# Altium PCB 微步進驅動器TB6560.PCBDOC
Units mm, origin at the board's own origin, x right, y up, seen from the top; angles counter-clockwise.
Board outline 152.4 x 101.6 mm, 2 copper layers (Top Layer, Bottom Layer); 26 components, 27 nets, 101 pads, 16 vias.
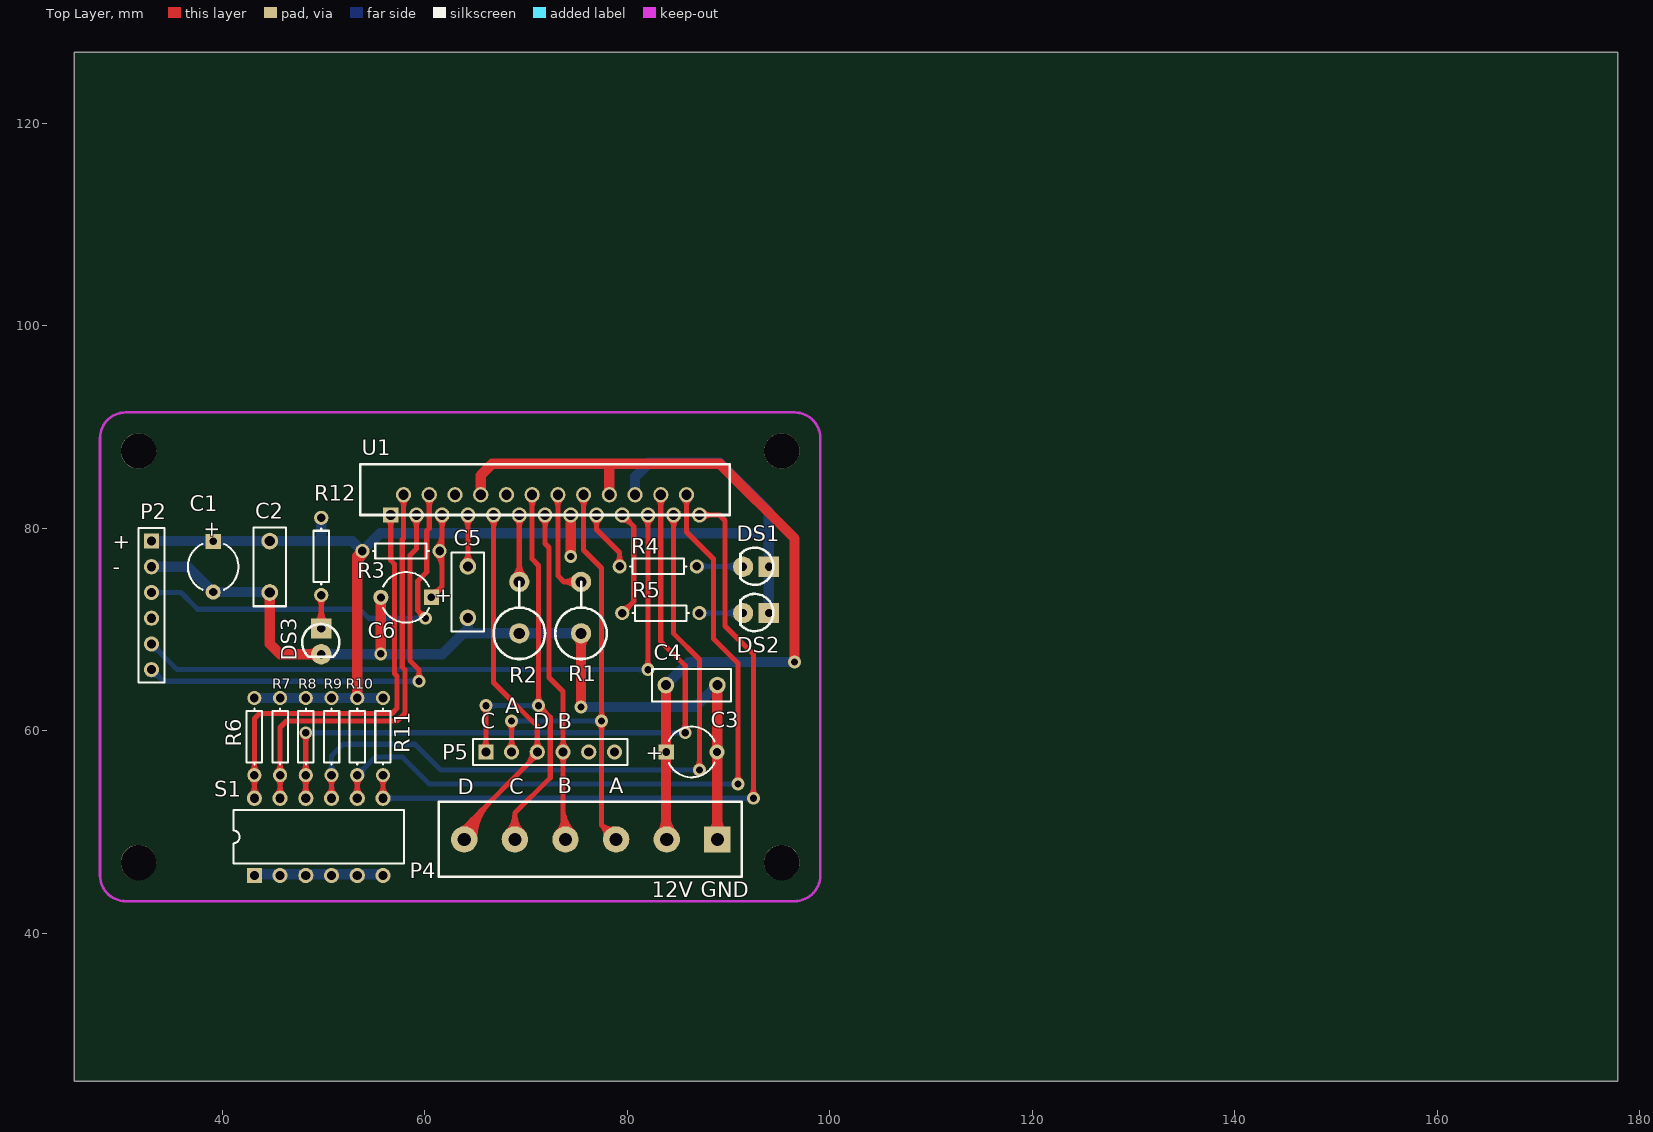
[diagram p0: Top Layer view]
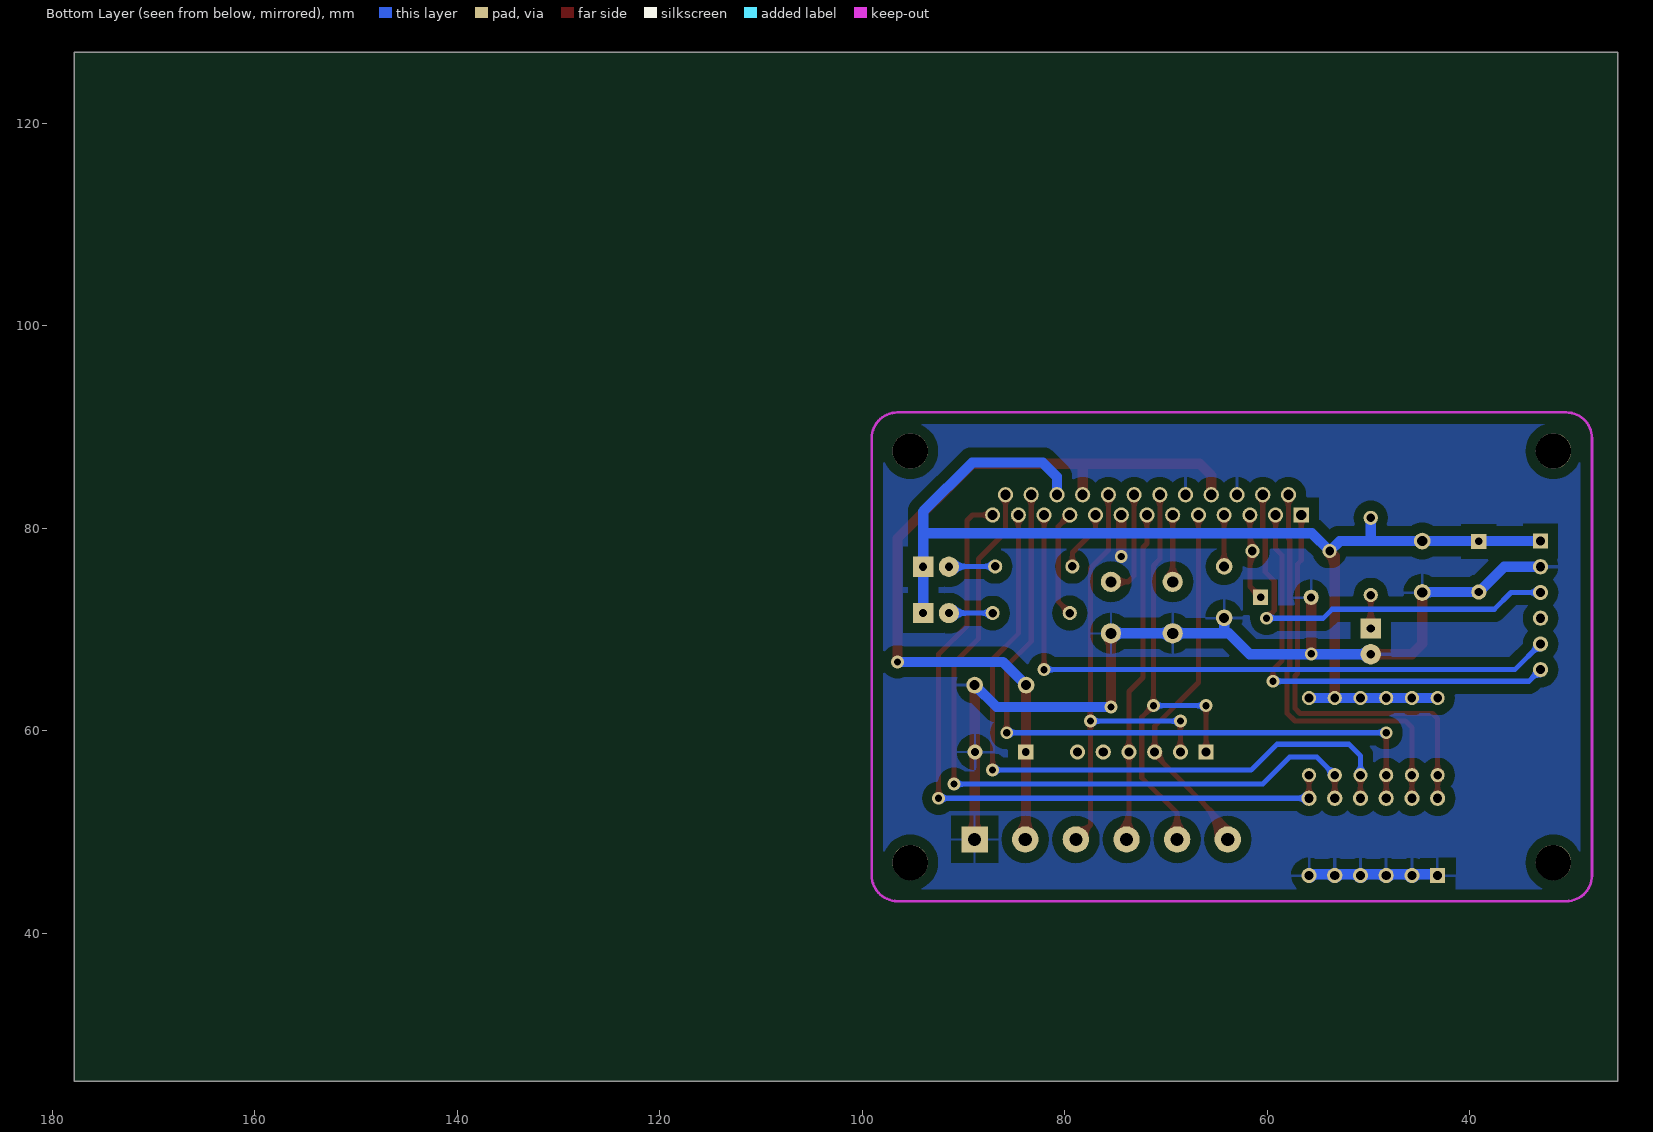
[diagram p1: Bottom Layer view, seen from below]

## Layer stack, top to bottom
Top Layer: signal copper 0.0356
Dielectric: dielectric 0.32, FR-4, Dk 4.8
Bottom Layer: signal copper 0.0356

## Board outline
25.4,25.4 177.8,25.4 177.8,127 25.4,127

## Design rules (kind name [scope] priority, off if disabled: settings)
Clearance [All] p1: gap=0.254
ComponentClearance [All] p1: gap=0.254 collisioncheckmode=0
HoleSize [All] p1: absolutevalues=TRUE maxlimit=3.81 minlimit=0.025 maxpercent=80.000 minpercent=20.000
PolygonConnect [All] p1: connectstyle=Relief reliefconductorwidth=0.254 reliefentries=4 polygonreliefangle="90 Angle"
RoutingVias [All] p1: holewidth=0.711 width=1.27 viastyle="Through Hole" minholewidth=0.711 minwidth=1.27 maxholewidth=0.711 maxwidth=1.27
SolderMaskExpansion [All] p1: expansion=0.102
TestPointUsage [All] p1: valid=0 allowmultiple=FALSE
Testpoint [All] p1: side=15 testpointundercomponent=TRUE minsize=1.016 maxsize=2.54 preferedsize=1.524 minholesize=0 maxholesize=1.016 preferedholesize=0.813 testpointgrid=0.025 style=1023 order=-539222988
Width power [InNetClass('power')] p1: maxlimit=1.016 minlimit=0.254 preferedwidth=1.016
Width [All] p2: maxlimit=1.016 minlimit=0.254 preferedwidth=0.508
16 further rules are at their usual default settings.

## Classes and differential pairs
net class power: +12 GND VCC

## Components (designator, comment, footprint, x,y, rotation, side; value= is the part's Value field where it differs from the comment)
C1 "Cap Pol1" CAPPR5-5x5 39.116,76.2 r270 top
C2 "Cap" CAPR5.08-7.8x3.2 44.704,76.2 r90 top
C3 "Cap Pol1" CAPPR5-5x5 86.36,57.912 r0 top
C4 "Cap" CAPR5.08-7.8x3.2 86.36,64.516 r180 top
C5 "Cap" CAPR5.08-7.8x3.2 64.262,73.692 r90 top
C6 "Cap Pol1" CAPPR5-5x5 58.166,73.184 r180 top
DS1 "LED1" "LED 3mm T" 93.98,76.2 r180 top
DS2 "LED1" "LED 3mm T" 93.98,71.628 r180 top
DS3 "LED1" "LED 3mm T" 49.784,70.104 r270 top
P2 "Header 6" HDR1X6 33.02,78.74 r270 top
P4 "Header 6" 6pinºÝ¤l-1 88.9,49.276 r180 top
P5 "Header 6" HDR1X6 66.04,57.912 r0 top
R1 "Res1" ¹qªý5.08mm 75.438,74.708 r270 top
R2 "Res1" ¹qªý5.08mm 69.342,74.708 r270 top
R3 "Res1" AXIAL-0.3 57.658,77.756 r180 top
R4 "Res1" AXIAL-0.3 83.058,76.232 r0 top
R5 "Res1" AXIAL-0.3 83.312,71.628 r0 top
R6 "Res1" AXIAL-0.3 43.18,59.436 r90 top
R7 "Res1" AXIAL-0.3 45.72,59.436 r90 top
R8 "Res1" AXIAL-0.3 48.26,59.436 r90 top
R9 "Res1" AXIAL-0.3 50.8,59.436 r90 top
R10 "Res1" AXIAL-0.3 53.34,59.436 r90 top
R11 "Res1" AXIAL-0.3 55.88,59.436 r90 top
R12 "Res1" AXIAL-0.3 49.784,77.216 r90 top
S1 "SW DIP-6" DIP-12/SW 49.53,49.53 r0 top
U1 "TB6560" TB6560AHQ 56.642,81.312 r0 top

## Footprints (in the part's own frame and the unit in brackets; to place one, negate y for a bottom-side part, rotate by r counter-clockwise, add the part's x,y. Pads: shape width x height; smd on the part's side, far side on the other; paste and mask are expansions set on the pad)
6pinºÝ¤l-1 [mm]
  rect 2.6x2.6 hole 1.3: 1(0,0)
  round 2.6 hole 1.3: 2(5,0) 3(10,0) 4(15,0) 5(20,0) 6(25,0)
  silkscreen extent -2.4,-3.7 27.5,3.7
AXIAL-0.3 [mm] "Resistor; 2 Leads"
  round 1.4 hole 0.85: 1(-3.81,0) 2(3.81,0)
  silkscreen extent -2.77,-0.76 2.77,0.76
CAPPR5-5x5 [mm] "Capacitor, Electrolytic, Radial; Body 5 x 5 mm (Dia.xH typ); Pin Spacing 5 mm (typ)"
  rect 1.5x1.5 hole 0.75: 1(-2.5,0)
  round 1.5 hole 0.8: 2(2.5,0)
  silkscreen extent -2.26,-2.5 2.27,2.5
CAPR5.08-7.8x3.2 [mm] "Capacitor, Ceramic, Thru-Hole, Dipped Radial; Body 7.8 x 3.2 mm (WxT) Pin Spacing 5.08 mm (typ)"
  round 1.65 hole 1: 1(-2.54,0) 2(2.54,0)
  silkscreen extent -3.9,-1.6 3.9,1.6
DIP-12/SW [mm] "DIP Switch; 12 Leads"
  rect 1.5x1.5 hole 0.9: 1(-6.35,-3.81)
  round 1.5 hole 0.9: 2(-3.81,-3.81) 3(-1.27,-3.81) 4(1.27,-3.81) 5(3.81,-3.81) 6(6.35,-3.81) 7(6.35,3.81) 8(3.81,3.81) 9(1.27,3.81) 10(-1.27,3.81) 11(-3.81,3.81) 12(-6.35,3.81)
  silkscreen extent -8.43,-2.65 8.41,2.65
HDR1X6 [mm] "Connector; Header; 6 Position"
  rect 1.5x1.5 hole 0.9: 1(0,0)
  round 1.5 hole 0.9: 2(2.54,0) 3(5.08,0) 4(7.62,0) 5(10.16,0) 6(12.7,0)
  silkscreen extent -1.27,-1.27 13.97,1.27
"LED 3mm T" [mm]
  rect 2x2 hole 0.8: 1(0,0)
  round 2 hole 0.8: 2(2.54,0)
  silkscreen extent -0.45,-1.89 2.8,1.79
TB6560AHQ [mm]
  rect 1.5x1.5 hole 1: 1(0,0)
  round 1.5 hole 1: 2(1.27,2) 3(2.54,0) 4(3.81,2) 5(5.08,0) 6(6.35,2) 7(7.62,0) 8(8.89,2) 9(10.16,0) 10(11.43,2) 11(12.7,0) 12(13.97,2) 13(15.24,0) 14(16.51,2) 15(17.78,0) 16(19.05,2) 17(20.32,0) 18(21.59,2) 19(22.86,0) 20(24.13,2) 21(25.4,0) 22(26.67,2) 23(27.94,0) 24(29.21,2) 25(30.48,0)
  silkscreen extent -3,0 33.48,5
¹qªý5.08mm [mm]
  round 2 hole 1.1: 1(0,0) 2(5.08,0)
  silkscreen extent 0,-2.54 7.62,2.54

## Part data
C1 C3 C6: "Polarized Capacitor (Radial)"
C2 C4 C5: "Capacitor"
DS1 DS2 DS3: "Typical RED GaAs LED"
P2: library part "Header 3", "Header, 3-Pin"
P4 P5: "Header, 6-Pin"
R1 R2 R3 R4 R5 R6 R7 R8 R9 R10 R11 R12: "Resistor"
S1: "DIP Switch"

## Free pads (board coordinates)
  round 3.5 hole 3.5: 0(31.75,87.63) 1(31.75,46.99) 2(95.25,46.99) 3(95.25,87.63)

## Via types
v1: diameter 1.27, hole 0.711, Top Layer to Bottom Layer, 16 vias

## Nets (pads, with @x,y where several pads share a name; then routed paths per layer and width w, separated by ;. In a path a pad name is that pad's centre, name@x,y a point inside that pad or via, vN(x,y) a via of type N, cw(c..) or ccw(c..) an arc to the next point about the centre after c; other vN are vias at no path point)
+12: C3.1 C4.2 P4.2 U1.8 U1.18 | length 83.6
  Top Layer w1.016: U1.8 65.532,85.217 66.675,86.36 89.154,86.36 96.52,78.994 v1(96.52,66.802) ; U1.18 78.232,86.36 ; P4.2@83.34,49.836 ccw(c82.181,50.995) 83.82,50.995 ; 83.82,51.381 ccw(c86.005,51.381) P4.2@84.46,49.836 ; C4.2 83.82,49.356 P4.2
  Bottom Layer w1.016: C4.2 86.106,66.802 v1(96.52,66.802)
A: P4.3 P5.2 U1.16 | length 61
  Top Layer w0.508: P5.2@68.229,58.263 ccw(c67.383,59.109) 68.58,59.109 ccw(c69.777,59.109) P5.2@68.931,58.263 ; v1@68.311,60.691 cw(c67.66,60.04) 68.58,60.04 cw(c69.5,60.04) v1@68.849,60.691 ; P5.2 v1(68.58,60.96) ; U1.16@75.341,82.961 cw(c74.495,82.115) 75.692,82.115 cw(c76.889,82.115) U1.16@76.043,82.961 ; U1.16 75.692,77.851 77.47,76.073 77.47,50.706 ; v1@77.201,60.691 cw(c76.55,60.04) 77.47,60.04 cw(c78.39,60.04) v1@77.739,60.691 ; v1@77.201,61.229 ccw(c76.55,61.88) 77.47,61.88 ccw(c78.39,61.88) v1@77.739,61.229 ; P4.3@77.869,49.452 ccw(c76.458,49.693) 77.47,50.706 ; P4.3@78.724,50.307 cw(c78.483,51.718) 77.47,50.706 ; P4.3 77.47,50.706
  Bottom Layer w0.508: v1(68.58,60.96) v1(77.47,60.96) ; v1@68.849,60.691 cw(c69.5,60.04) 69.5,60.96 cw(c69.5,61.88) v1@68.849,61.229 ; v1@77.201,60.691 ccw(c76.55,60.04) 76.55,60.96 ccw(c76.55,61.88) v1@77.201,61.229
B: P4.4 P5.4 U1.13 | length 44.1
  Top Layer w0.508: U1.13@71.531,80.961 cw(c70.685,80.115) 71.882,80.115 cw(c73.079,80.115) U1.13@72.233,80.961 ; U1.13 71.882,78.486 72.263,78.105 72.263,65.278 73.66,63.881 73.66,49.516 P4.4 ; P4.4@73.16,50.016 ccw(c71.954,51.222) 73.66,51.222 ; P5.4@73.309,57.561 cw(c72.463,56.715) 73.66,56.715 cw(c74.857,56.715) P5.4@74.011,57.561 ; P5.4@73.309,58.263 ccw(c72.463,59.109) 73.66,59.109 ccw(c74.857,59.109) P5.4@74.011,58.263 ; 73.66,51.154 ccw(c75.778,51.154) P4.4@74.28,49.656 ; 73.66,52.381 ccw(c77.005,52.381) P4.4@74.64,50.016
C: P4.5 P5.1 U1.12 | length 60.9
  Top Layer w0.508: P5.1@65.689,58.263 ccw(c64.843,59.109) 66.04,59.109 ccw(c67.237,59.109) P5.1@66.391,58.263 ; v1@65.771,62.215 cw(c65.12,61.564) 66.04,61.564 cw(c66.96,61.564) v1@66.309,62.215 ; P5.1 v1(66.04,62.484) ; P4.5@68.16,50.016 ccw(c66.375,51.801) 68.9,51.801 ccw(c71.425,51.801) P4.5@69.64,50.016 ; P4.5 68.9,51.882 72.39,55.372 72.39,61.341 v1(71.247,62.484) 71.247,76.327 70.612,76.962 U1.12 ; U1.12@70.261,82.961 cw(c69.415,82.115) 70.612,82.115 cw(c71.809,82.115) U1.12@70.963,82.961 ; v1@70.978,62.753 ccw(c70.327,63.404) 71.247,63.404 ccw(c72.167,63.404) v1@71.516,62.753 ; v1@71.247,62.103 cw(c71.247,61.183) 71.897,61.834 cw(c72.548,62.484) v1@71.628,62.484
  Bottom Layer w0.508: v1(66.04,62.484) v1(71.247,62.484) ; v1@66.309,62.215 cw(c66.96,61.564) 66.96,62.484 cw(c66.96,63.404) v1@66.309,62.753 ; v1@70.978,62.215 ccw(c70.327,61.564) 70.327,62.484 ccw(c70.327,63.404) v1@70.978,62.753
COM1: P5.5
COM2: P5.6
D: P4.6 P5.3 U1.9 | length 52.1
  Top Layer w0.508: P4.6 63.9,50.438 71.12,57.658 71.12,60.452 66.802,64.77 U1.9 ; P4.6@63.93,49.276 cw(c66.808,49.276) 64.773,51.311 ; P4.6@64.438,49.276 cw(c68.542,49.276) 65.64,52.178 ; P4.6@64.946,49.276 cw(c70.277,49.276) 66.507,53.045 ; U1.9@66.451,80.961 cw(c65.605,80.115) 66.802,80.115 cw(c67.999,80.115) U1.9@67.153,80.961 ; 70.094,56.632 ccw(c68.813,57.912) P5.3@70.624,57.912 ; 70.707,57.245 cw(c71.12,56.832) P5.3@71.12,57.416 ; P5.3@70.769,58.263 ccw(c69.923,59.109) 71.12,59.109 ccw(c72.317,59.109) P5.3@71.471,58.263
GND: C1.2 C2.1 C3.2 C4.1 C5.1 C6.2 DS3.2 P2.2 P4.1 R1.2 R2.2 S1.1 S1.2 S1.3 S1.4 S1.5 S1.6 U1.6 U1.10 U1.15 | length 134
  Top Layer w1.016: C2.1 44.704,68.58 45.72,67.564 DS3.2 ; DS3.2@49.436,67.216 ccw(c48.596,66.376) 48.596,67.564 ccw(c48.596,68.752) DS3.2@49.436,67.912 ; v1(55.666,67.604) C6.2 ; v1(74.422,77.216) U1.15 ; R1.2@75.09,69.28 cw(c74.25,68.44) 75.438,68.44 cw(c76.626,68.44) R1.2@75.786,69.28 ; v1(75.438,62.357) R1.2 ; P4.1@88.34,49.836 ccw(c86.988,51.188) 88.9,51.188 ccw(c90.812,51.188) P4.1@89.46,49.836 ; P4.1 C4.1@88.9,64.77
  Bottom Layer w1.016: P2.2 36.616,76.2 C1.2 44.664,73.7 C2.1 ; S1.1@43.053,45.847 S1.6@56.007,45.847 ; S1.1@43.351,45.549 cw(c44.071,44.829) 44.071,45.847 ; 43.842,73.7 cw(c43.842,72.798) C2.1@44.48,73.436 ; 44.829,45.847 cw(c44.829,44.829) S1.2@45.549,45.549 ; S1.2@45.891,45.549 cw(c46.611,44.829) 46.611,45.847 ; 47.369,45.847 cw(c47.369,44.829) S1.3@48.089,45.549 ; S1.3@48.431,45.549 cw(c49.151,44.829) 49.151,45.847 ; DS3.2 61.722,67.564 63.786,69.628 R1.2 ; 49.909,45.847 cw(c49.909,44.829) S1.4@50.629,45.549 ; DS3.2@50.132,67.216 cw(c50.972,66.376) 50.972,67.564 cw(c50.972,68.752) DS3.2@50.132,67.912 ; S1.4@50.971,45.549 cw(c51.691,44.829) 51.691,45.847 ; 52.449,45.847 cw(c52.449,44.829) S1.5@53.169,45.549 ; S1.5@53.511,45.549 cw(c54.231,44.829) 54.231,45.847 ; 54.989,45.847 cw(c54.989,44.829) S1.6@55.709,45.549 ; 64.262,69.628 C5.1 ; R2.2@68.994,69.28 ccw(c68.154,68.44) 68.154,69.628 ccw(c68.154,70.816) R2.2@68.994,69.976 ; R2.2@69.69,69.28 cw(c70.53,68.44) 70.53,69.628 cw(c70.53,70.816) R2.2@69.69,69.976 ; R1.2@75.09,69.28 ccw(c74.25,68.44) 74.25,69.628 ccw(c74.25,70.816) R1.2@75.09,69.976 ; v1(75.438,62.357) 86.741,62.357 C4.1
NetC5_2: C5.2 U1.7 | length 9.1
  Top Layer w0.508: C5.2@63.858,76.636 ccw(c62.883,77.611) 64.262,77.611 ccw(c65.641,77.611) C5.2@64.666,76.636 ; U1.7@63.911,80.961 cw(c63.065,80.115) 64.262,80.115 cw(c65.459,80.115) U1.7@64.613,80.961 ; C5.2 U1.7
NetC6_1: C6.1 R3.1 U1.5 | length 15.4
  Top Layer w0.508: C6.1 61.722,74.24 U1.5 ; C6.1@60.666,73.68 ccw(c60.666,74.877) 61.513,74.031 ccw(c62.359,73.184) C6.1@61.162,73.184 ; R3.1@61.153,77.441 cw(c59.778,76.066) 61.722,76.066 ; R3.1@61.153,78.071 ccw(c59.778,79.446) 61.722,79.446 ; U1.5@61.371,80.961 cw(c60.525,80.115) 61.722,80.115 cw(c62.919,80.115) U1.5@62.073,80.961
NetDS1_2: DS1.2 R4.2 | length 9.1
  Bottom Layer w0.508: R4.2 DS1.2@91.408,76.232 ; R4.2@87.183,75.917 cw(c87.945,75.155) 87.945,76.232 cw(c87.945,77.309) R4.2@87.183,76.547 ; 89.562,76.232 cw(c89.562,74.322) DS1.2@90.912,75.672 ; 89.716,76.232 ccw(c89.716,77.924) DS1.2@90.912,76.728
NetDS2_2: DS2.2 R5.2 | length 8.8
  Bottom Layer w0.508: R5.2 DS2.2 ; R5.2@87.437,71.313 cw(c88.199,70.551) 88.199,71.628 cw(c88.199,72.705) R5.2@87.437,71.943 ; DS2.2@90.912,71.1 ccw(c89.639,69.827) 89.639,71.628 ccw(c89.639,73.429) DS2.2@90.912,72.156
NetDS3_1: DS3.1 R12.1 | length 7.8
  Top Layer w0.508: DS3.1@49.256,70.632 ccw(c47.983,71.905) 49.784,71.905 ccw(c51.585,71.905) DS3.1@50.312,70.632 ; R12.1@49.469,73.091 cw(c48.707,72.329) 49.784,72.329 cw(c50.861,72.329) R12.1@50.099,73.091 ; DS3.1 R12.1
NetP2_3: P2.3 U1.4 | length 47.7
  Top Layer w0.508: v1@59.69,71.12 ccw(c58.77,71.12) 59.421,71.77 ccw(c60.071,72.421) v1@60.071,71.501 ; v1(60.071,71.12) 59.309,71.882 59.309,74.803 60.198,75.692 60.198,79.756 60.452,80.01 U1.4 ; U1.4@60.101,82.961 cw(c59.255,82.115) 60.452,82.115 cw(c61.649,82.115) U1.4@60.803,82.961
  Bottom Layer w0.508: P2.3 35.941,73.66 37.592,72.009 53.594,72.009 54.483,71.12 v1(60.071,71.12) ; P2.3@33.371,73.309 cw(c34.217,72.463) 34.217,73.66 cw(c34.217,74.857) P2.3@33.371,74.011 ; v1@59.802,70.851 ccw(c59.151,70.2) 59.151,71.12 ccw(c59.151,72.04) v1@59.802,71.389
NetP2_5: P2.5 U1.21 | length 72
  Top Layer w0.508: U1.21@81.691,80.961 cw(c80.845,80.115) 82.042,80.115 cw(c83.239,80.115) U1.21@82.393,80.961 ; v1@81.773,66.309 ccw(c81.122,66.96) 82.042,66.96 ccw(c82.962,66.96) v1@82.311,66.309 ; v1(82.042,66.04) U1.21
  Bottom Layer w0.508: P2.5@33.02,68.084 cw(c33.02,66.887) 33.867,67.733 cw(c34.713,68.58) P2.5@33.516,68.58 ; P2.5 35.56,66.04 v1(82.042,66.04) ; v1@81.773,65.771 ccw(c81.122,65.12) 81.122,66.04 ccw(c81.122,66.96) v1@81.773,66.309
NetP2_6: P2.6 U1.3 | length 50.6
  Top Layer w0.508: U1.3@58.831,80.961 cw(c57.985,80.115) 59.182,80.115 cw(c60.379,80.115) U1.3@59.533,80.961 ; v1@59.167,65.166 ccw(c58.516,65.817) 59.436,65.817 ccw(c60.356,65.817) v1@59.705,65.166 ; U1.3 59.182,77.978 58.547,77.343 58.547,66.929 59.436,66.04 v1(59.436,64.897)
  Bottom Layer w0.508: P2.6@33.02,65.544 cw(c33.02,64.347) 33.867,65.193 cw(c34.713,66.04) P2.6@33.516,66.04 ; P2.6 34.163,64.897 v1(59.436,64.897) ; v1@59.167,64.628 ccw(c58.516,63.977) 58.516,64.897 ccw(c58.516,65.817) v1@59.167,65.166
NetR1_1: R1.1 U1.14 | length 15
  Top Layer w0.508: U1.14@72.801,82.961 cw(c71.955,82.115) 73.152,82.115 cw(c74.349,82.115) U1.14@73.503,82.961 ; U1.14 73.152,75.311 73.755,74.708 ; R1.1@74.885,74.207 ccw(c73.755,73.183) 73.755,74.708 ; R1.1@74.885,75.209 cw(c73.755,76.233) 73.755,74.708 ; R1.1 73.755,74.708
NetR2_1: R2.1 U1.11 | length 11.3
  Top Layer w0.508: R2.1@68.814,75.236 ccw(c67.541,76.509) 69.342,76.509 ccw(c71.143,76.509) R2.1@69.87,75.236 ; U1.11@68.991,80.961 cw(c68.145,80.115) 69.342,80.115 cw(c70.539,80.115) U1.11@69.693,80.961 ; R2.1 U1.11
NetR4_1: R4.1 U1.17 | length 9.6
  Top Layer w0.508: U1.17@76.611,80.961 cw(c75.765,80.115) 76.962,80.115 cw(c78.159,80.115) U1.17@77.313,80.961 ; U1.17 76.962,79.883 79.248,77.597 R4.1 ; R4.1@78.933,76.547 ccw(c78.171,77.309) 79.248,77.309 ccw(c80.325,77.309) R4.1@79.563,76.547
NetR5_1: R5.1 U1.19 | length 14.2
  Top Layer w0.508: R5.1 80.645,72.771 80.645,80.169 U1.19 ; R5.1@79.502,72.074 ccw(c79.502,73.151) 80.263,72.389 ccw(c81.025,71.628) R5.1@79.948,71.628 ; U1.19@79.502,80.816 cw(c79.502,79.619) 80.349,80.465 cw(c81.195,81.312) U1.19@79.998,81.312
NetR6_1: R6.1 S1.12 U1.1 | length 48.9
  Top Layer w0.508: S1.12@42.829,53.691 ccw(c41.983,54.537) 43.18,54.537 ccw(c44.377,54.537) S1.12@43.531,53.691 ; R6.1@42.865,55.311 cw(c42.103,54.549) 43.18,54.549 cw(c44.257,54.549) R6.1@43.495,55.311 ; R6.1@42.865,55.941 ccw(c42.103,56.703) 43.18,56.703 ccw(c44.257,56.703) R6.1@43.495,55.941 ; S1.12 43.18,61.214 43.688,61.722 56.769,61.722 57.277,62.23 57.277,65.405 57.023,65.659 57.023,76.454 56.642,76.835 U1.1 ; U1.1@56.291,80.961 cw(c55.445,80.115) 56.642,80.115 cw(c57.839,80.115) U1.1@56.993,80.961
NetR7_1: R7.1 S1.11 U1.2 | length 48.8
  Top Layer w0.508: S1.11@45.369,53.691 ccw(c44.523,54.537) 45.72,54.537 ccw(c46.917,54.537) S1.11@46.071,53.691 ; R7.1@45.405,55.311 cw(c44.643,54.549) 45.72,54.549 cw(c46.797,54.549) R7.1@46.035,55.311 ; R7.1@45.405,55.941 ccw(c44.643,56.703) 45.72,56.703 ccw(c46.797,56.703) R7.1@46.035,55.941 ; S1.11 45.72,60.325 46.355,60.96 57.277,60.96 58.039,61.722 58.039,66.04 57.785,66.294 57.785,78.867 57.912,78.994 U1.2 ; U1.2@57.561,82.961 cw(c56.715,82.115) 57.912,82.115 cw(c59.109,82.115) U1.2@58.263,82.961
NetR8_1: R8.1 S1.10 U1.22 | length 81.4
  Top Layer w0.508: S1.10@47.909,53.691 ccw(c47.063,54.537) 48.26,54.537 ccw(c49.457,54.537) S1.10@48.611,53.691 ; R8.1@47.945,55.311 cw(c47.183,54.549) 48.26,54.549 cw(c49.337,54.549) R8.1@48.575,55.311 ; R8.1@47.945,55.941 ccw(c47.183,56.703) 48.26,56.703 ccw(c49.337,56.703) R8.1@48.575,55.941 ; v1@47.991,59.548 cw(c47.34,58.897) 48.26,58.897 cw(c49.18,58.897) v1@48.529,59.548 ; S1.10 v1(48.26,59.817) ; U1.22@82.961,82.961 cw(c82.115,82.115) 83.312,82.115 cw(c84.509,82.115) U1.22@83.663,82.961 ; U1.22 83.312,68.834 85.725,66.421 v1(85.725,59.817) ; v1@85.456,60.086 ccw(c84.805,60.737) 85.725,60.737 ccw(c86.645,60.737) v1@85.994,60.086
  Bottom Layer w0.508: v1(48.26,59.817) v1(85.725,59.817) ; v1@48.529,59.548 cw(c49.18,58.897) 49.18,59.817 cw(c49.18,60.737) v1@48.529,60.086 ; v1@85.456,59.548 ccw(c84.805,58.897) 84.805,59.817 ccw(c84.805,60.737) v1@85.456,60.086
NetR9_1: R9.1 S1.9 U1.23 | length 78.3
  Top Layer w0.508: S1.9@50.449,53.691 ccw(c49.603,54.537) 50.8,54.537 ccw(c51.997,54.537) S1.9@51.151,53.691 ; R9.1@50.485,55.311 cw(c49.723,54.549) 50.8,54.549 cw(c51.877,54.549) R9.1@51.115,55.311 ; S1.9 R9.1 ; U1.23@84.231,80.961 cw(c83.385,80.115) 84.582,80.115 cw(c85.779,80.115) U1.23@84.933,80.961 ; U1.23 84.582,69.596 87.122,67.056 v1(87.122,56.134) ; v1@86.853,56.403 ccw(c86.202,57.054) 87.122,57.054 ccw(c88.042,57.054) v1@87.391,56.403
  Bottom Layer w0.508: R9.1@50.485,55.941 ccw(c49.723,56.703) 50.8,56.703 ccw(c51.877,56.703) R9.1@51.115,55.941 ; R9.1 50.8,57.531 51.943,58.674 59.055,58.674 61.595,56.134 v1(87.122,56.134) ; v1@86.853,55.865 ccw(c86.202,55.214) 86.202,56.134 ccw(c86.202,57.054) v1@86.853,56.403
NetR10_1: R10.1 S1.8 U1.24 | length 82.4
  Top Layer w0.508: S1.8@52.989,53.691 ccw(c52.143,54.537) 53.34,54.537 ccw(c54.537,54.537) S1.8@53.691,53.691 ; R10.1@53.025,55.311 cw(c52.263,54.549) 53.34,54.549 cw(c54.417,54.549) R10.1@53.655,55.311 ; S1.8 R10.1 ; U1.24@85.501,82.961 cw(c84.655,82.115) 85.852,82.115 cw(c87.049,82.115) U1.24@86.203,82.961 ; U1.24 85.852,79.629 88.519,76.962 88.519,69.088 90.932,66.675 v1(90.932,54.737) ; v1@90.663,55.006 ccw(c90.012,55.657) 90.932,55.657 ccw(c91.852,55.657) v1@91.201,55.006
  Bottom Layer w0.508: R10.1 55.118,57.404 57.785,57.404 60.452,54.737 v1(90.932,54.737) ; R10.1@53.34,56.072 ccw(c53.34,57.149) 54.101,56.387 ccw(c54.863,55.626) R10.1@53.786,55.626 ; v1@90.663,54.468 ccw(c90.012,53.817) 90.012,54.737 ccw(c90.012,55.657) v1@90.663,55.006
NetR11_1: R11.1 S1.7 U1.25 | length 80.4
  Top Layer w0.508: S1.7@55.529,53.691 ccw(c54.683,54.537) 55.88,54.537 ccw(c57.077,54.537) S1.7@56.231,53.691 ; R11.1@55.565,55.311 cw(c54.803,54.549) 55.88,54.549 cw(c56.957,54.549) R11.1@56.195,55.311 ; S1.7 R11.1 ; U1.25 89.122,81.312 89.662,80.772 89.662,70.358 92.456,67.564 v1(92.456,53.34) ; U1.25@87.473,80.961 cw(c88.319,80.115) 88.319,81.312 cw(c88.319,82.509) U1.25@87.473,81.663 ; v1@92.187,53.609 ccw(c91.536,54.26) 92.456,54.26 ccw(c93.376,54.26) v1@92.725,53.609
  Bottom Layer w0.508: S1.7 v1(92.456,53.34) ; S1.7@56.231,52.989 cw(c57.077,52.143) 57.077,53.34 cw(c57.077,54.537) S1.7@56.231,53.691 ; v1@92.187,53.071 ccw(c91.536,52.42) 91.536,53.34 ccw(c91.536,54.26) v1@92.187,53.609
VCC: C1.1 C2.2 DS1.1 DS2.1 P2.1 R3.2 R6.2 R7.2 R8.2 R9.2 R10.2 R11.2 R12.2 U1.20 | length 127.5
  Top Layer w1.016: R10.2 53.34,77.248 R3.2 ; 53.34,76.066 cw(c55.538,76.066) R3.2@53.984,77.62 ; 53.34,77.038 cw(c53.867,77.038) R3.2@53.853,77.564
  Bottom Layer w1.016: P2.1 52.864,78.74 R3.2 55.594,79.502 93.98,79.502 ; R6.2 R11.2 ; 49.784,78.74 R12.2 ; U1.20 80.772,85.09 82.169,86.487 89.154,86.487 93.98,81.661 DS2.1 ; DS2.1@93.632,71.976 ccw(c92.792,72.816) 93.98,72.816 ccw(c95.168,72.816) DS2.1@94.328,71.976 ; DS1.1@93.632,75.852 cw(c92.792,75.012) 93.98,75.012 cw(c95.168,75.012) DS1.1@94.328,75.852 ; DS1.1@93.632,76.548 ccw(c92.792,77.388) 93.98,77.388 ccw(c95.168,77.388) DS1.1@94.328,76.548
pads on no net: P2.4

## Polygon pours and split planes (outlines as drawn)
GND on Bottom Layer (solid, remove dead copper): 28.321,91.059 28.321,43.815 98.425,43.815 98.425,90.932 28.321,90.932

## Keep-outs
Keep-Out Layer:
  lines w0.254: 27.94,45.72 ccw(c30.48,45.72) 30.48,43.18 96.52,43.18 ccw(c96.52,45.72) 99.06,45.72 99.06,88.9 ccw(c96.52,88.9) 96.52,91.44 30.48,91.44 ccw(c30.48,88.9) 27.94,88.9 27.94,45.72

## Silkscreen, mask and mechanical layers (free items; w line width, h text height)
Top Overlay:
  text "+" at 29.21,77.978 h1.52
  text "-" at 29.21,75.438 h1.52
  text "A" at 67.945,61.722 h1.52
  text "C" at 65.532,60.198 h1.52
  text "D" at 70.739,60.198 h1.52
  text "B" at 73.152,60.198 h1.52
  text "B" at 73.152,53.848 h1.52
  text "A" at 78.232,53.848 h1.52
  text "D" at 63.246,53.721 h1.52
  text "C" at 68.326,53.721 h1.52
  text "12V" at 82.423,43.561 h1.52
  text "GND" at 87.249,43.561 h1.52

## Text inside footprints (layer, text, board x,y; h text height)
C1: Top Overlay "+" at 38.366,80.75 h1.5 r270
C3: Top Overlay "+" at 81.81,57.162 h1.5
C6: Top Overlay "+" at 62.716,73.934 h1.5 r180